# EAGLE board sd_rtc (EAGLE 4.16)
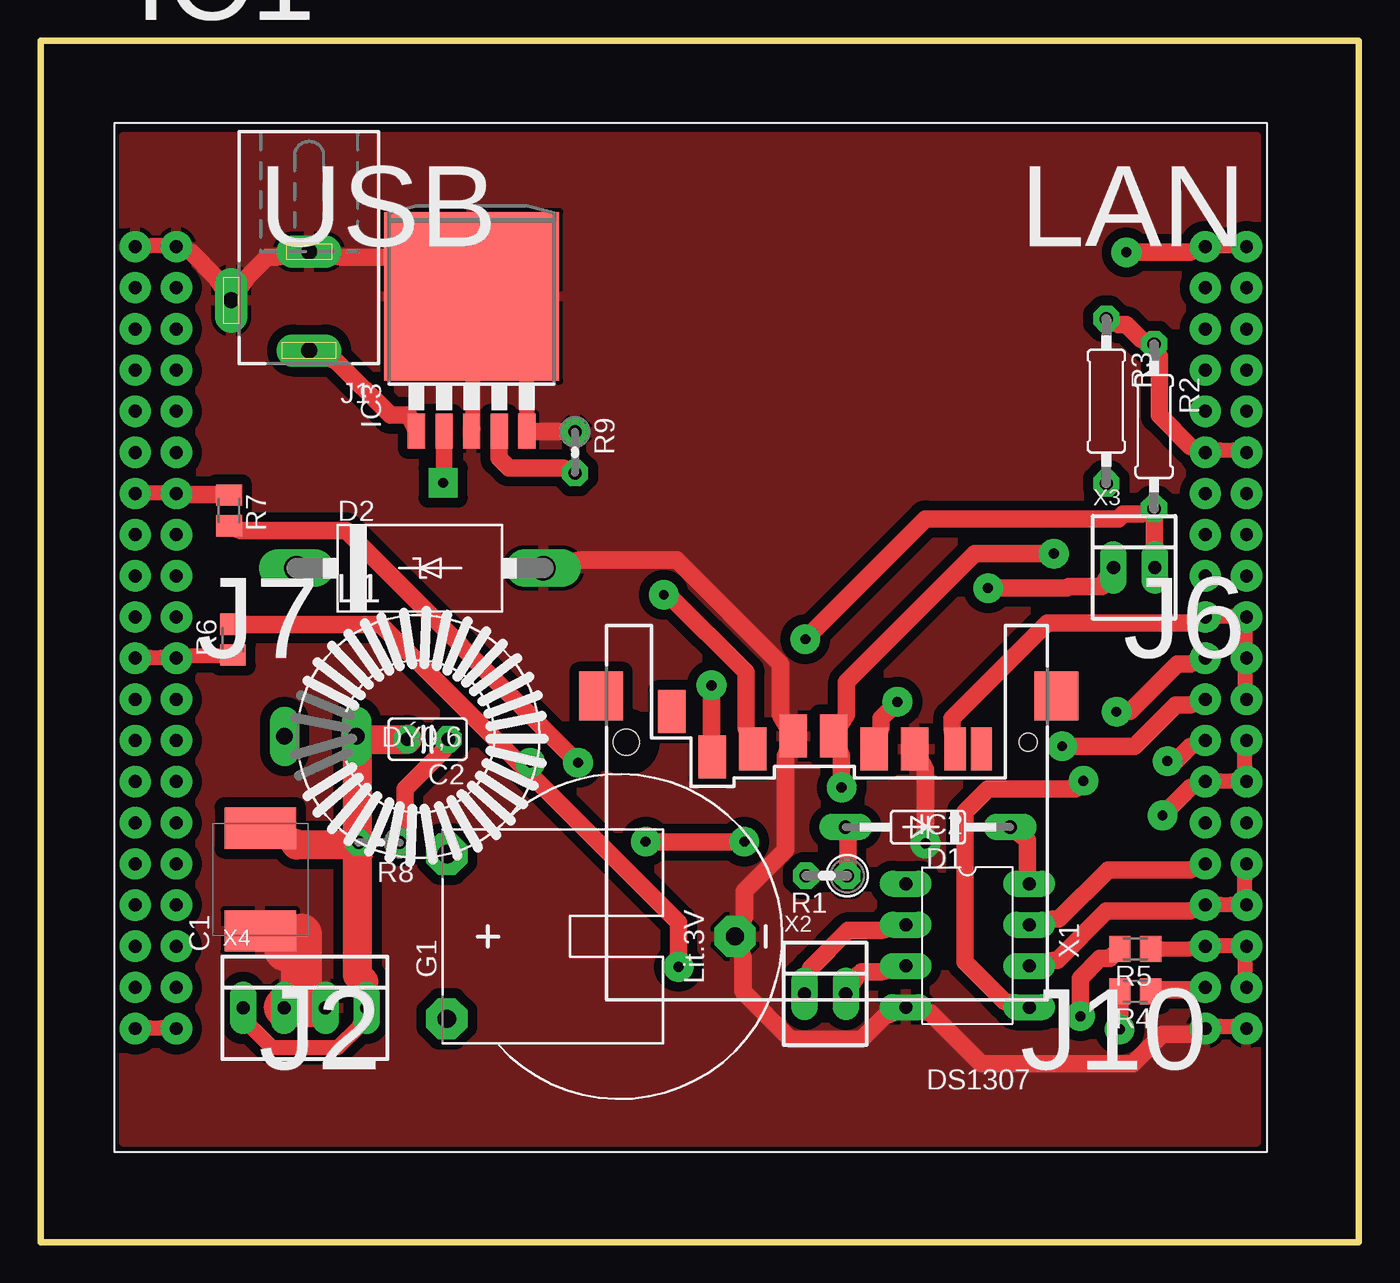
[diagram p0: board, top side]
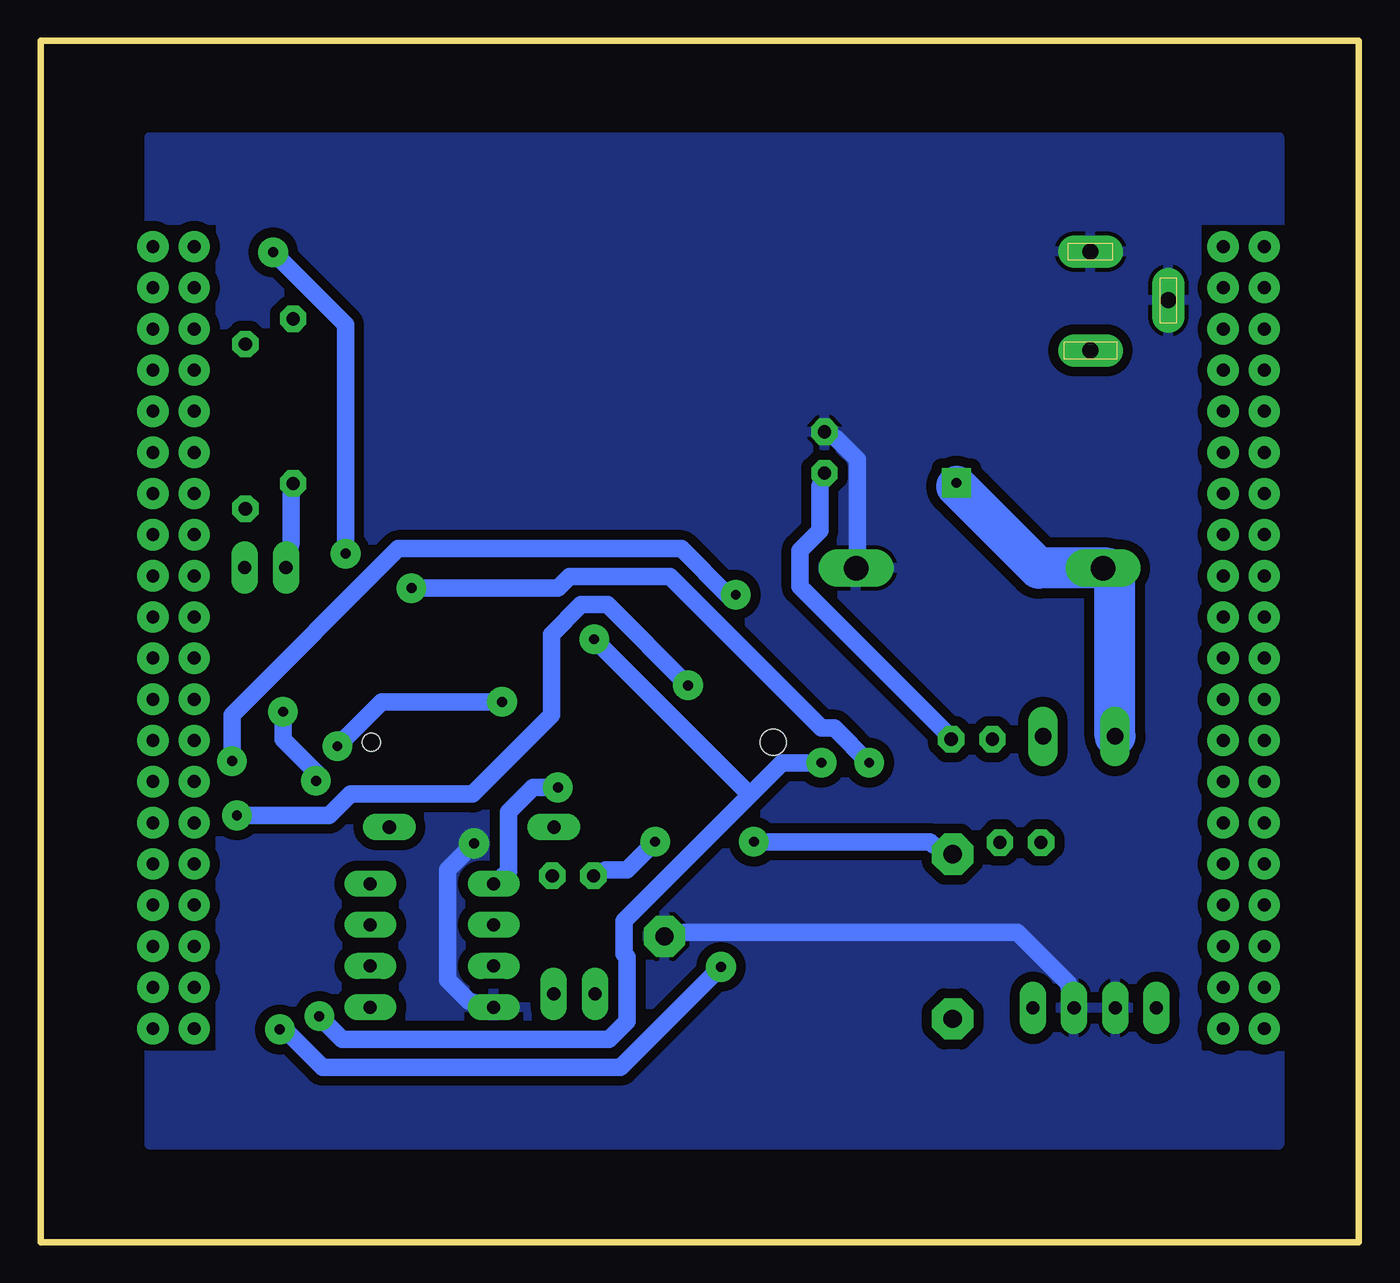
[diagram p1: board, bottom side, seen from below]

Size 81.36 x 74.18 mm. Coordinates in mm from the lower left corner, seen from the top.
Outline: 0,74.18 81.36,74.18 81.36,0 0,0 0,74.18
Copper layers (1*16): Top 0.035mm / dielectric 1.5mm / Bottom 0.035mm
Design rules "mio": minimum track width 42mil, minimum drill 24mil, track to track 24mil, track to pad 24mil, pad to pad 24mil, via to via 24mil, smd to smd 24mil, copper to edge 50mil, drill to drill 24mil, minimum pad ring 16mil, minimum via ring 24mil, stop-mask expansion 4mil, vias tented up to drill 0mil, thermal gap 10mil

## Footprints (pad centres in the part's own frame; a part is rotated, then mirrored left to right if it is on the bottom)
E/7260-38R = smd 2.55 x 4.4: + 3.175,0; - -3.175,0
C025-025X050 = drill 0.813 octagon: 1 -1.27,0; 2 1.27,0
DO35-10 = drill 0.813 long: A 5.08,0; C -5.08,0
C4111-15 = drill 1.499 long: A 7.62,0; C -7.62,0
CR2032H = drill 1.118 pad 2.54 octagon: + 5.08,10.795; +@1 -5.08,10.795; - 0,-6.985
FOX = drill 0.8 pad 1.93 round: J6.1 67.31,0; J6.2 69.85,0; J6.3 67.31,-2.54; J6.4 69.85,-2.54; J6.5 67.31,-5.08; J6.6 69.85,-5.08; J6.7 67.31,-7.62; J6.8 69.85,-7.62; J6.9 67.31,-10.16; J6.10 69.85,-10.16; J6.11 67.31,-12.7; J6.12 69.85,-12.7; J6.13 67.31,-15.24; J6.14 69.85,-15.24; J6.15 67.31,-17.78; J6.16 69.85,-17.78; J6.17 67.31,-20.32; J6.18 69.85,-20.32; J6.19 67.31,-22.86; J6.20 69.85,-22.86; J6.21 67.31,-25.4; J6.22 69.85,-25.4; J6.23 67.31,-27.94; J6.24 69.85,-27.94; J6.25 67.31,-30.48; J6.26 69.85,-30.48; J6.27 67.31,-33.02; J6.28 69.85,-33.02; J6.29 67.31,-35.56; J6.30 69.85,-35.56; J6.31 67.31,-38.1; J6.32 69.85,-38.1; J6.33 67.31,-40.64; J6.34 69.85,-40.64; J6.35 67.31,-43.18; J6.36 69.85,-43.18; J6.37 67.31,-45.72; J6.38 69.85,-45.72; J6.39 67.31,-48.26; J6.40 69.85,-48.26; J7.1 1.27,0; J7.2 3.81,0; J7.3 1.27,-2.54; J7.4 3.81,-2.54; J7.5 1.27,-5.08; J7.6 3.81,-5.08; J7.7 1.27,-7.62; J7.8 3.81,-7.62; J7.9 1.27,-10.16; J7.10 3.81,-10.16; J7.11 1.27,-12.7; J7.12 3.81,-12.7; J7.13 1.27,-15.24; J7.14 3.81,-15.24; J7.15 1.27,-17.78; J7.16 3.81,-17.78; J7.17 1.27,-20.32; J7.18 3.81,-20.32; J7.19 1.27,-22.86; J7.20 3.81,-22.86; J7.21 1.27,-25.4; J7.22 3.81,-25.4; J7.23 1.27,-27.94; J7.24 3.81,-27.94; J7.25 1.27,-30.48; J7.26 3.81,-30.48; J7.27 1.27,-33.02; J7.28 3.81,-33.02; J7.29 1.27,-35.56; J7.30 3.81,-35.56; J7.31 1.27,-38.1; J7.32 3.81,-38.1; J7.33 1.27,-40.64; J7.34 3.81,-40.64; J7.35 1.27,-43.18; J7.36 3.81,-43.18; J7.37 1.27,-45.72; J7.38 3.81,-45.72; J7.39 1.27,-48.26; J7.40 3.81,-48.26
DS1307 = drill 0.8 long: 1 -8.89,-5.08; 2 -6.35,-5.08; 3 -3.81,-5.08; 4 -1.27,-5.08; 5 -1.27,2.54; 6 -3.81,2.54; 7 -6.35,2.54; 8 -8.89,2.54
TO263-5 = smd 1.067 x 2.159: 1 -3.404,-5.791; 2 -1.702,-5.791; 3 0,-5.791; 4 1.702,-5.791; 5 3.404,-5.791 | smd 10.8 x 10.41: 6 0,2.54
DCJ0202 = drill 1 pad 2 long: 1 0,3.1; 2 4.8,0; 3 0,-3
ED16 = drill 1.016 long: 1 -8.255,0; 2 -3.81,0
0207/2V = drill 0.813 octagon: 1 -1.27,0; 2 1.27,0
0207/10 = drill 0.813 octagon: 1 -5.08,0; 2 5.08,0
M0805 = smd 1.3 x 1.6: 1 -0.95,0; 2 0.95,0
0204V = drill 0.813 octagon: 1 -1.27,0; 2 1.27,0
FPS009-3003 = smd 2.65 x 1.7: 1 -0.915,-5.3; 2 -0.415,-7.8; 3 0.385,-10.3; 4 0.385,-12.8; 5 -0.415,-15.3; 6 -0.415,-17.8; 9 1.885,-2.8 | smd 2.65 x 1.3: 7 -0.415,-20.3; 8 -0.415,-21.925 | smd 3 x 2.7: M1 2.85,1.55; M2 2.85,-26.55 | hole 1.6: 0,0 | hole 1.1: 0,-24.8
22-23-2021 = drill 0.813 long: 1 -1.27,0; 2 1.27,0
22-23-2041 = drill 0.813 long: 1 -3.81,0; 2 -1.27,0; 3 1.27,0; 4 3.81,0

## Placement (x,y rotation side)
C1  [E/7260-38R]  13.56,22.4 90 top
C2  10nf  [C025-025X050]  23.89,31.06 180 top
D1  1N4148  [DO35-10]  54.76,25.63 180 top
D2  1N5822  [C4111-15]  23.41,41.61 0 top
G1  CR2032H  [CR2032H]  35.87,18.88 90 top
IC1  FOX  [FOX]  4.57,61.46 0 top
IC2  DS1307  [DS1307]  58.47,13.25 270 top
IC3  [TO263-5]  26.6,55.85 0 top
J1  DCJ0202  [DCJ0202]  16.57,58.15 180 top
L1  ED16  [ED16]  23.31,31.23 0 top
R1  [0207/2V]  48.51,22.63 180 top
R2  [0207/10]  68.72,50.36 270 top
R3  [0207/10]  65.77,51.92 270 top
R4  [M0805]  67.55,15.5 180 top
R5  [M0805]  67.55,18.12 180 top
R6  [M0805]  11.87,37.2 90 top
R7  [M0805]  11.63,45.18 270 top
R8  3k  [0204V]  20.89,24.68 180 top
R9  1k  [0204V]  32.98,48.76 270 top
X1  FPS009-30003  [FPS009-3003]  36.14,30.88 90 top
X2  22-23-2021  [22-23-2021]  48.42,15.34 0 top
X3  22-23-2021  [22-23-2021]  67.49,41.66 0 top
X4  22-23-2041  [22-23-2041]  16.31,14.48 0 top

## Library data of the parts
C1 C2 R1-R9 = rcl
D1 D2 = diode
G1 = battery
IC1 IC2 = aggiunte
IC3 = linear
J1 = con-jack
L1 = inductors
X1 = con-yamaichi
X2-X4 = con-molex

## Nets
GND: C1.- D2.A G1.- IC1.J6.39 IC1.J6.40 IC1.J7.1 IC1.J7.2 IC2.4 IC3.3 IC3.5 IC3.6 J1.2 J1.3 R9.1 X1.3 X1.6 X4.2 X4.3
N$1: IC1.J6.21 IC2.5
N$2: IC1.J6.26 IC1.J6.27 IC1.J6.28 X1.1
N$3: IC1.J6.31 IC2.7
N$4: IC1.J6.37 R4.1
N$5: R2.2 R5.2 R7.2 X3.2
N$6: IC2.3 X2.2
N$7: IC2.2 X2.1
N$8: D1.A R1.1
N$9: D1.C IC2.8
N$10: G1.+ R1.2
N$11: IC1.J6.25 X1.2
N$12: IC1.J6.23 X1.5
N$13: C2.1 IC3.4 R8.1 R9.2
N$14: IC1.J6.19 IC1.J6.20 IC1.J6.22 IC1.J6.24 X1.7
N$15: R3.2 R4.2 R6.2 X3.1
N$16: IC1.J6.11 IC1.J6.12 R2.1 R3.1
N$17: IC1.J6.1 IC1.J6.2 IC2.1 X1.4
N$18: IC1.J6.32 IC1.J6.33 IC1.J6.34 IC2.6
N$19: IC1.J6.35 IC1.J6.36 IC1.J6.38 R5.1
N$20: IC1.J7.21 IC1.J7.22 R6.1
N$21: IC1.J7.13 IC1.J7.14 R7.1
N$23: IC1.J7.39 IC1.J7.40
N$24: D2.C IC3.2 L1.1
N$27: IC3.1 J1.1
N$29: C1.+ C2.2 L1.2 R8.2 X4.1 X4.4

## Tracks (layer width: path | path; a pad name or v marks a point on that pad's centre or on a via)
GND  (via drill 0.61)
  Top 0.914: IC1.J6.40 73.61,13.35 72.8,13.35 IC1.J6.39 | IC1.J7.1 6.76,61.51 7.47,61.51 IC1.J7.2 | IC3.3 26.67,51.05 26.67,53.28 IC3.6 30.02,53.28 30.02,51.05 IC3.5 | X4.2 15.7,14.57 | 17.02,14.57 X4.3 | 15.09,18.03 C1.-
  Top 1.067: IC1.J7.2 9.3,61.1 10.82,59.58 J1.2 12.75,59.58 13.97,60.8 14.58,60.8 J1.3 18.54,60.8 21.29,60.8 IC3.6 | v54.61,24.63 54.61,29.2 X1.6 | IC1.J6.39 70.97,12.84 69.24,12.84 67.41,11.02 58.07,11.02 54.92,14.16 IC2.4 52.07,13.96 50.65,12.54 46.28,12.54 43.33,15.49 43.33,17.62 G1.- 43.44,20.06 43.44,21.68 45.98,24.22 45.98,30.01 X1.3 45.67,32.55 45.67,35.7 39.27,42.1 33.28,42.1 D2.A | R9.1 32.26,50.03 30.53,50.03 IC3.5
  Top 2.54: 15.09,18.03 16.11,19.04 16.11,15.59 15.39,14.88 | X4.2 15.04,14.53 15.39,14.88 | 17.02,14.57 15.7,14.57 15.39,14.88
  Bottom 1.067: v54.61,24.63 56.24,23 56.24,16.2 54.92,14.88 IC2.4 | X4.3 17.93,15.99 21.08,19.14 41.61,19.14 G1.- | R9.1 32.26,49.62 30.94,48.3 30.94,42.71 D2.A
  pour Top: 5.13,68.22 5.13,6.24 75.03,6.24 75.03,68.22
  pour Bottom: 4.93,68.22 4.93,6.04 74.63,6.04 74.63,68.22
N$1  (via drill 0.61)
  Top 1.067: v64.37,28.49 63.86,27.98 58.47,27.98 57.05,26.56 57.05,17.31 59.49,14.88 IC2.5 | v66.4,32.76 67.21,32.76 70.16,35.7 70.97,35.7 IC1.J6.21
  Bottom 1.067: v64.37,28.49 64.37,29 66.4,31.03 v66.4,32.76
N$2  (via drill 0.61)
  Top 0.914: IC1.J6.27 72.8,28.49 73.51,28.49 IC1.J6.28 74.32,29.3 74.32,30.12 IC1.J6.26
  Top 1.067: v41.4,34.38 41.4,31.23 X1.1 | v69.24,26.36 70.97,28.08 IC1.J6.27
  Bottom 1.067: v41.4,34.38 46.38,39.36 48.01,39.36 49.84,37.53 49.84,32.55 54.71,27.68 62.23,27.68 63.55,26.36 v69.24,26.36
N$3
  Top 1.067: IC2.7 62.54,19.96 62.84,19.96 65.89,23 70.97,23 IC1.J6.31
N$4
  Top 1.067: R4.1 69.14,15.59 70.97,15.59 IC1.J6.37
N$5  (via drill 0.61)
  Top 1.067: X3.2 68.73,43.22 68.73,44.54 R2.2 67.92,44.95 66.8,44.95 66.5,44.64 54.61,44.64 v47.2,37.23 | v64.16,13.96 64.16,16.3 65.38,17.52 65.99,17.52 R5.2 | v33.17,29.61 18.85,43.93 12.35,43.93 R7.2
  Bottom 1.067: v64.16,13.96 62.74,12.54 46.28,12.54 45.16,13.66 45.16,17.62 45.37,17.82 45.37,19.85 37.59,27.63 | 37.59,27.63 35.61,29.61 v33.17,29.61 | 37.59,27.63 v47.2,37.23
N$6
  Top 1.067: IC2.3 51.87,16.7 50.65,16.7 50.45,16.5 X2.2
N$7
  Top 1.067: IC2.2 51.87,19.24 49.84,19.24 47.5,16.91 X2.1
N$8
  Top 1.067: R1.1 49.84,23.41 49.84,24.83 D1.A
N$9
  Top 1.067: IC2.8 60.91,22.9 60.91,24.83 D1.C
N$10  (via drill 0.61)
  Top 1.067: v37.34,24.73 v43.44,24.73
  Bottom 1.067: v43.44,24.73 45.16,23 46.48,23 R1.2 | v37.34,24.73 26.47,24.73 26.27,24.53 G1.+
N$11  (via drill 0.61)
  Top 1.067: v38.46,39.97 38.76,39.97 43.54,35.2 43.54,31.74 X1.2 | v69.55,29.71 70.06,29.71 70.97,30.62 IC1.J6.25
  Bottom 1.067: v38.46,39.97 38.97,39.97 41.81,42.82 59.29,42.82 69.55,32.55 v69.55,29.71
N$12  (via drill 0.61)
  Top 1.067: v52.88,33.37 51.87,32.35 51.87,31.74 X1.5 | v63.04,30.62 67.51,30.62 70.06,33.16 70.97,33.16 IC1.J6.23
  Bottom 1.067: v52.88,33.37 60.3,33.37 v63.04,30.62
N$13
  Top 1.067: R8.1 22.51,25.44 22.51,27.98 24.84,30.32 C2.1 | IC3.4 28.3,49.01 28.3,48.4 28.91,47.79 32.26,47.79 R9.2
  Bottom 1.067: R9.2 33.28,46.68 33.28,43.93 34.49,42.71 34.49,40.48 25.66,31.64 C2.1
N$14
  Top 0.914: IC1.J6.19 72.8,38.65 73.51,38.65 IC1.J6.20 74.32,37.74 74.32,36.92 IC1.J6.22 74.32,35.2 74.32,34.38 IC1.J6.24
  Top 1.067: X1.7 56.24,31.74 56.24,32.35 62.13,38.24 70.97,38.24 IC1.J6.19
N$15  (via drill 0.61)
  Top 1.067: v66.6,13.15 66.6,14.77 R4.2 | v39.37,17.01 39.37,19.75 29.87,29.25 | 29.87,29.25 20.98,38.14 12.65,38.14 R6.2 | v58.47,40.38 63.35,40.38 63.45,40.48 65.48,40.48 X3.1 | 29.87,29.25 v30.23,29.61
  Bottom 1.067: R3.2 65.89,46.07 65.89,43.22 X3.1 | v66.6,13.15 66.3,13.15 63.96,10.81 45.57,10.81 v39.37,17.01 | v58.47,40.38 49.43,40.38 48.72,41.09 42.52,41.09 33.17,31.74 32.36,31.74 v30.23,29.61
N$16
  Top 0.914: IC1.J6.11 72.8,48.91 73.61,48.91 IC1.J6.12
  Top 1.067: R3.1 66.5,56.63 67.01,56.63 67.92,55.72 R2.1 69.04,54.7 69.04,51.05 70.97,49.12 IC1.J6.11
N$17  (via drill 0.61)
  Top 0.914: IC1.J6.2 73.61,61.51 72.8,61.51 IC1.J6.1
  Top 1.067: v49.43,28.08 49.43,30.01 X1.4 49.73,32.55 49.73,34.59 57.66,42.51 v62.54,42.51 | v67.01,61.1 70.97,61.1 IC1.J6.1
  Bottom 1.067: v49.43,28.08 50.95,28.08 52.48,26.56 52.48,22.9 IC2.1 | v67.01,61.1 62.54,56.63 v62.54,42.51
N$18
  Top 0.914: IC1.J6.33 72.8,20.87 73.51,20.87 IC1.J6.34 74.32,21.68 74.32,22.5 IC1.J6.32
  Top 1.067: IC2.6 62.54,17.42 62.74,17.42 65.79,20.46 70.97,20.46 IC1.J6.33
N$19
  Top 0.914: R5.1 69.14,18.13 70.97,18.13 IC1.J6.35 72.8,18.33 73.51,18.33 IC1.J6.36 74.32,17.42 74.32,16.6 IC1.J6.38
N$20
  Top 0.914: R6.1 11.13,36.21 9.3,36.21 IC1.J7.22 7.47,36.11 6.76,36.11 IC1.J7.21
N$21
  Top 0.914: IC1.J7.13 6.76,46.27 7.47,46.27 IC1.J7.14
  Top 1.067: R7.1 10.92,46.17 9.3,46.17 IC1.J7.14
N$23
  Top 0.914: IC1.J7.39 6.76,13.25 7.47,13.25 IC1.J7.40
N$24  (via drill 0.6)
  Top 1.016: IC3.2 24.9,46.94 v24.84,46.88
  Bottom 0.914: D2.C 15.09,40.58
  Bottom 1.016: v24.84,46.88 24.23,46.27 24.23,46.07
  Bottom 2.54: L1.1 15.06,41.16 15.51,41.61 D2.C 19.78,41.61 24.23,46.07 24.84,46.68
N$27
  Top 1.067: IC3.1 22.71,51.05 21.59,51.05 18.24,54.4 J1.1
N$29
  Top 0.914: X4.1 12.96,13.35 14.28,12.03 18.34,12.03 19.66,13.35 X4.4 | C2.2 22,31.03 | L1.2 20.17,31.03 | R8.2 19.05,24.63
  Top 1.067: 15.7,24.63 C1.+ | X4.4 19.97,16.1 | R8.2 19.97,23.92
  Top 1.778: R8.2 19.47,24.53 15.8,24.53 15.7,24.63 | L1.2 19.56,31.23 19.56,24.74 R8.2 | C2.2 22.59,31.03 20.17,31.03 | R8.2 19.57,24.73 19.56,24.73 19.56,16.5 19.97,16.1